# EAGLE board aux board (EAGLE 6.3)
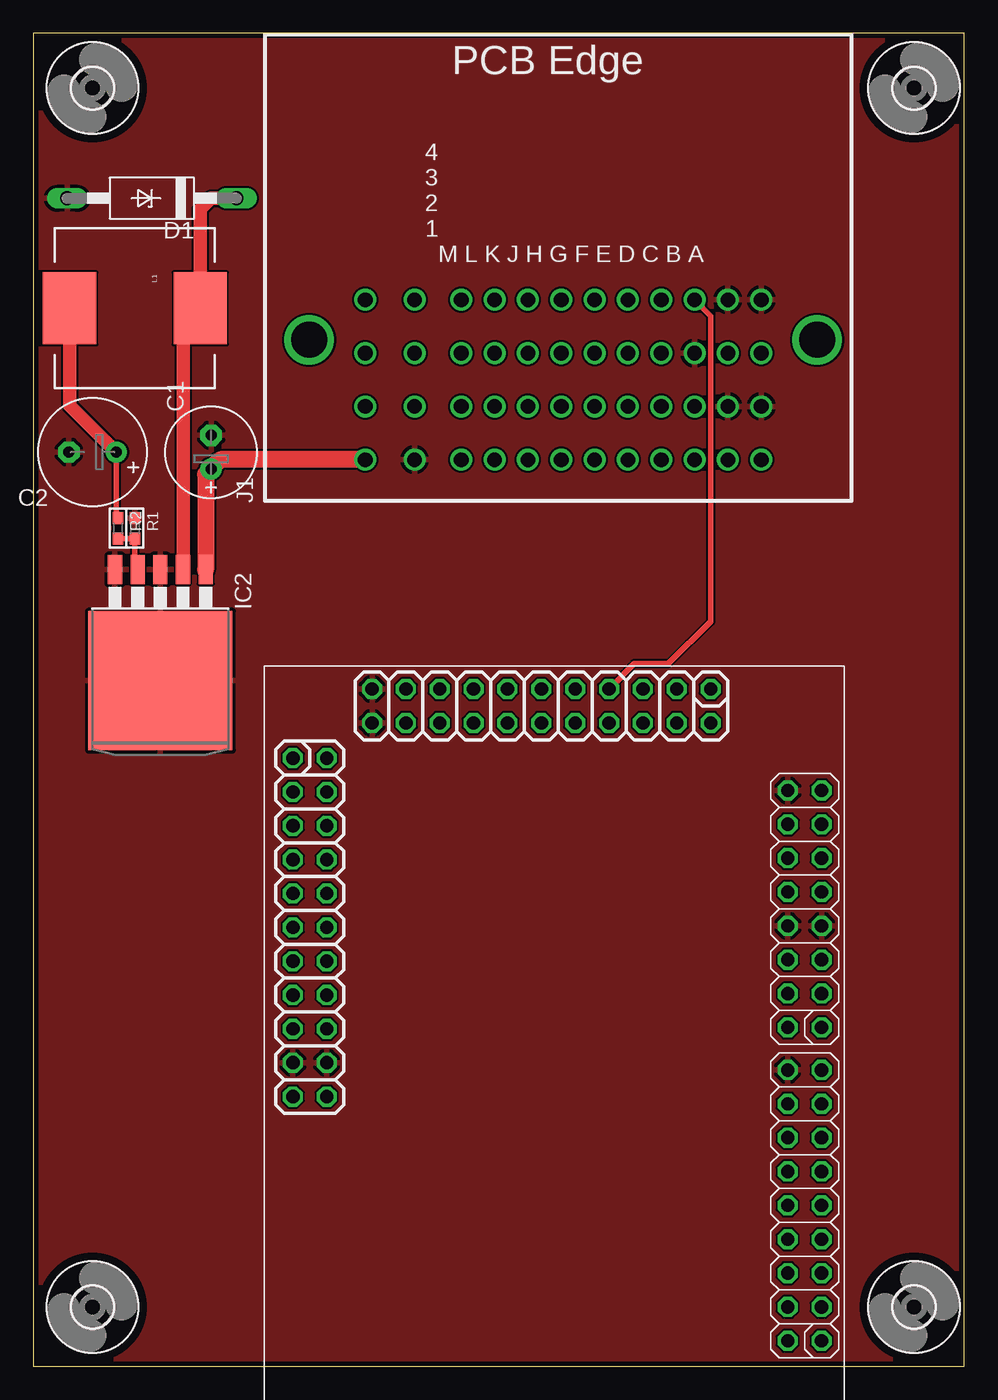
[diagram p0: board, top side]
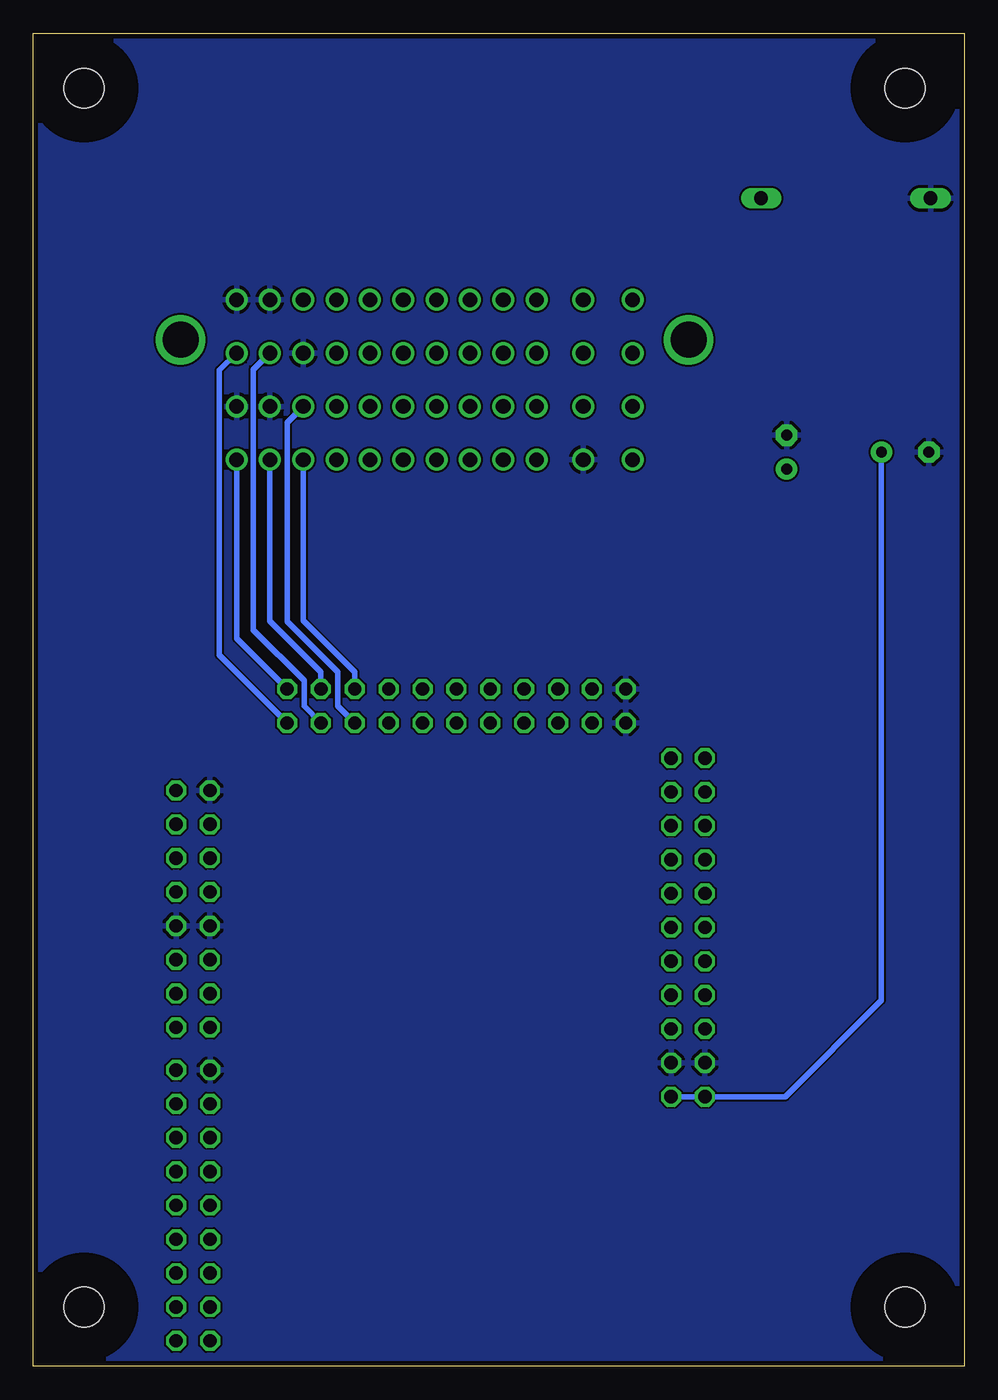
[diagram p1: board, bottom side, seen from below]

Size 69.83 x 100 mm. Coordinates in mm from the lower left corner, seen from the top.
Outline: 0,0 69.83,0 69.83,100 0,100 0,0
Copper layers (1*16): Top 0.0356mm / dielectric 1.5011mm / Bottom 0.0356mm
Design rules "LaenPCBOrder": minimum track width 6mil, minimum drill 13mil, track to track 6mil, track to pad 6mil, pad to pad 6mil, via to via 6mil, smd to smd 6mil, copper to edge 15mil, drill to drill 6mil, minimum pad ring 7mil, minimum via ring 7mil, stop-mask expansion 3mil, vias tented up to drill 0mil, thermal gap 10mil

## Footprints (pad centres in the part's own frame; a part is rotated, then mirrored left to right if it is on the bottom)
E2,5-7 = drill 0.813 pad 1.6: + -1.27,0 | drill 0.813 pad 1.6 octagon: - 1.27,0
E3,5-8 = drill 0.813 pad 1.6: + -1.778,0 | drill 0.813 pad 1.6 octagon: - 1.778,0
F126Z12 = drill 1.016 long: A 6.35,0; C -6.35,0
3,0 = hole 3: 0,0
TO263-5 = smd 1.067 x 2.159: 1 -3.404,-5.791; 2 -1.702,-5.791; 3 0,-5.791; 4 1.702,-5.791; 5 3.404,-5.791 | smd 10.8 x 10.41: 6 0,2.54
AUTOCONNECTOR = drill 1.1: A1 15.22,-6.92; A2 15.22,-2.92; A3 15.22,1.08; A4 15.22,5.08; B1 12.72,-6.92; B2 12.72,-2.92; B3 12.72,1.08; B4 12.72,5.08; C1 10.22,-6.92; C2 10.22,-2.92; C3 10.22,1.08; C4 10.22,5.08; D1 7.72,-6.92; D2 7.72,-2.92; D3 7.72,1.08; D4 7.72,5.08; E1 5.22,-6.92; E2 5.22,-2.92; E3 5.22,1.08; E4 5.22,5.08; F1 2.72,-6.92; F2 2.72,-2.92; F3 2.72,1.08; F4 2.72,5.08; G1 0.22,-6.92; G2 0.22,-2.92; G3 0.22,1.08; G4 0.22,5.08; H1 -2.28,-6.92; H2 -2.28,-2.92; H3 -2.28,1.08; H4 -2.28,5.08; J1 -4.78,-6.92; J2 -4.78,-2.92; J3 -4.78,1.08; J4 -4.78,5.08; K1 -7.28,-6.92; K2 -7.28,-2.92; K3 -7.28,1.08; K4 -7.28,5.08; L1 -10.78,-6.92; L2 -10.78,-2.92; L3 -10.78,1.08; L4 -10.78,5.08; M1 -14.48,-6.92; M2 -14.48,-2.92; M3 -14.48,1.08; M4 -14.48,5.08 | drill 2.7: SHIELD1 19.42,2.08; SHIELD2 -18.68,2.08
CDRH125 = smd 5.4 x 4: 1 0,4.9; 2 0,-4.9
_0603 = smd 0.9 x 0.8: 1 -0.762,0; 2 0.762,0
CPU-BOARD-JP1 = drill 1 octagon: P$1 1.27,-12.7; P$2 -1.27,-12.7; P$3 1.27,-10.16; P$4 -1.27,-10.16; P$5 1.27,-7.62; P$6 -1.27,-7.62; P$7 1.27,-5.08; P$8 -1.27,-5.08; P$9 1.27,-2.54; P$10 -1.27,-2.54; P$11 1.27,0; P$12 -1.27,0; P$13 1.27,2.54; P$14 -1.27,2.54; P$15 1.27,5.08; P$16 -1.27,5.08; P$17 1.27,7.62; P$18 -1.27,7.62; P$19 1.27,10.16; P$20 -1.27,10.16; P$21 1.27,12.7; P$22 -1.27,12.7; P$23 -3.905,18.637; P$24 -3.905,16.097; P$25 -6.445,18.637; P$26 -6.445,16.097; P$27 -8.985,18.637; P$28 -8.985,16.097; P$29 -11.525,18.637; P$30 -11.525,16.097; P$31 -14.065,18.637; P$32 -14.065,16.097; P$33 -16.605,18.637; P$34 -16.605,16.097; P$35 -19.145,18.637; P$36 -19.145,16.097; P$37 -21.685,18.637; P$38 -21.685,16.097; P$39 -24.225,18.637; P$40 -24.225,16.097; P$41 -26.765,18.637; P$42 -26.765,16.097; P$43 -29.305,18.637; P$44 -29.305,16.097; P$45 -47.625,-21.018; P$46 -47.625,-18.479; P$47 -45.085,-21.018; P$48 -45.085,-18.479; P$49 -42.545,-21.018; P$50 -42.545,-18.479; P$51 -40.005,-21.018; P$52 -40.005,-18.479; P$53 -37.465,-21.018; P$54 -37.465,-18.479; P$55 -34.925,-21.018; P$56 -34.925,-18.479; P$57 -32.385,-21.018; P$58 -32.385,-18.479; P$59 -29.845,-21.018; P$60 -29.845,-18.479; P$61 -27.305,-21.018; P$62 -27.305,-18.479; P$63 -24.115,-21.024; P$64 -24.115,-18.484; P$65 -21.575,-21.024; P$66 -21.575,-18.484; P$67 -19.035,-21.024; P$68 -19.035,-18.484; P$69 -16.495,-21.024; P$70 -16.495,-18.484; P$71 -13.955,-21.024; P$72 -13.955,-18.484; P$73 -11.415,-21.024; P$74 -11.415,-18.484; P$75 -8.875,-21.024; P$76 -8.875,-18.484; P$77 -6.335,-21.024; P$78 -6.335,-18.484

## Placement (x,y rotation side)
C1  100u  [E2,5-7]  13.34,68.58 90 top
C2  220uf  [E3,5-8]  4.45,68.58 180 top
D1  1n5824  [F126Z12]  8.89,87.63 180 top
H1  MOUNT-HOLE3.0  [3,0]  66.04,95.89 0 top
H2  MOUNT-HOLE3.0  [3,0]  4.45,95.89 0 top
H3  MOUNT-HOLE3.0  [3,0]  4.45,4.45 0 top
H4  MOUNT-HOLE3.0  [3,0]  66.04,4.45 0 top
IC2  lm2575  [TO263-5]  9.53,53.98 180 top
J1  [AUTOCONNECTOR]  39.37,74.93 0 top
L1  MSS1278-224KLD  [CDRH125]  7.62,79.38 270 top
R1  1k  [_0603]  7.62,62.87 270 top
R2  1k69  [_0603]  6.35,62.87 270 top
U$1  CPU-BOARD  [CPU-BOARD-JP1]  38.1,49.53 90 top

## Library data of the parts
C1 C2 = rcl
D1 = diode
H1-H4 = holes
IC2 = linear
J1 U$1 = unicorn_v2
L1 = SparkFun-Passives
R1 R2 = microbuilder

## Nets
3.3V: C2.+ L1.2 R2.1 U$1.P$43 U$1.P$44
12V: C1.+ IC2.1 J1.M1
BRAKEP1: J1.B1 U$1.P$3
BRAKEP2: J1.B3 U$1.P$4
GND: C1.- C2.- D1.A IC2.3 IC2.5 IC2.6 J1.A2 J1.A4 J1.B2 J1.B4 J1.C3 J1.L1 R1.1 U$1.P$21 U$1.P$22 U$1.P$41 U$1.P$42 U$1.P$62 U$1.P$69 U$1.P$70 U$1.P$78
IGNCUT: J1.C2 U$1.P$6
N$1: IC2.4 R1.2 R2.2
N$2: D1.C IC2.2 L1.1
NEUTRAL: J1.C1 U$1.P$5
OILP: J1.C4 U$1.P$7
VANDT1: J1.A1 U$1.P$1
VANDT2: J1.A3 U$1.P$2

## Tracks (layer width: path | path; a pad name or v marks a point on that pad's centre or on a via)
3.3V
  Top 0.406: R2.1 6.22,63.63 C2.+
  Top 1.016: L1.2 2.72,72.08 C2.+
  Bottom 0.406: U$1.P$44 U$1.P$43 13.43,20.23 6.22,27.43 C2.+
12V
  Top 1.27: J1.M1 14.04,68.01 C1.+ 12.93,66.9 IC2.1
BRAKEP1
  Bottom 0.406: J1.B1 52.09,55.9 48.26,52.07 U$1.P$3
BRAKEP2
  Bottom 0.406: J1.B3 53.34,74.76 53.34,55.24 49.53,51.44 49.53,49.53 U$1.P$4
GND
  pour Bottom: 0,0 69.85,0 69.85,100.33 0,100.33
  pour Top: 0,0 69.85,0 69.85,100.33 0,100.33
IGNCUT
  Bottom 0.406: J1.C2 50.8,70.8 50.8,55.88 46.99,52.07 46.99,49.53 U$1.P$6
N$1
  Top 0.406: IC2.4 7.62,59.77 R1.2 R2.2
N$2
  Top 1.016: IC2.2 11.23,77.45 L1.1 12.52,86.81 13.34,87.63 D1.C
NEUTRAL
  Bottom 0.406: J1.C1 49.59,55.94 45.72,52.07 U$1.P$5
OILP
  Top 0.406: J1.C4 50.8,78.8 50.8,55.88 47.62,52.7 45.09,52.7 U$1.P$7
VANDT1
  Bottom 0.406: J1.A1 54.59,54.59 U$1.P$1
VANDT2
  Bottom 0.406: J1.A3 55.88,74.72 55.88,53.34 U$1.P$2